# Altium PCB MultiSpikeHoldPCB.PcbDoc
Units mm, origin at the board's own origin, x right, y up, seen from the top; angles counter-clockwise.
Board outline 89.1 x 92.94 mm, 2 copper layers (Top Layer, Bottom Layer), stack 0.071 mm thick; 102 components, 74 nets, 366 pads, 91 vias.
Unrouted connection lines stored in the file: 32.
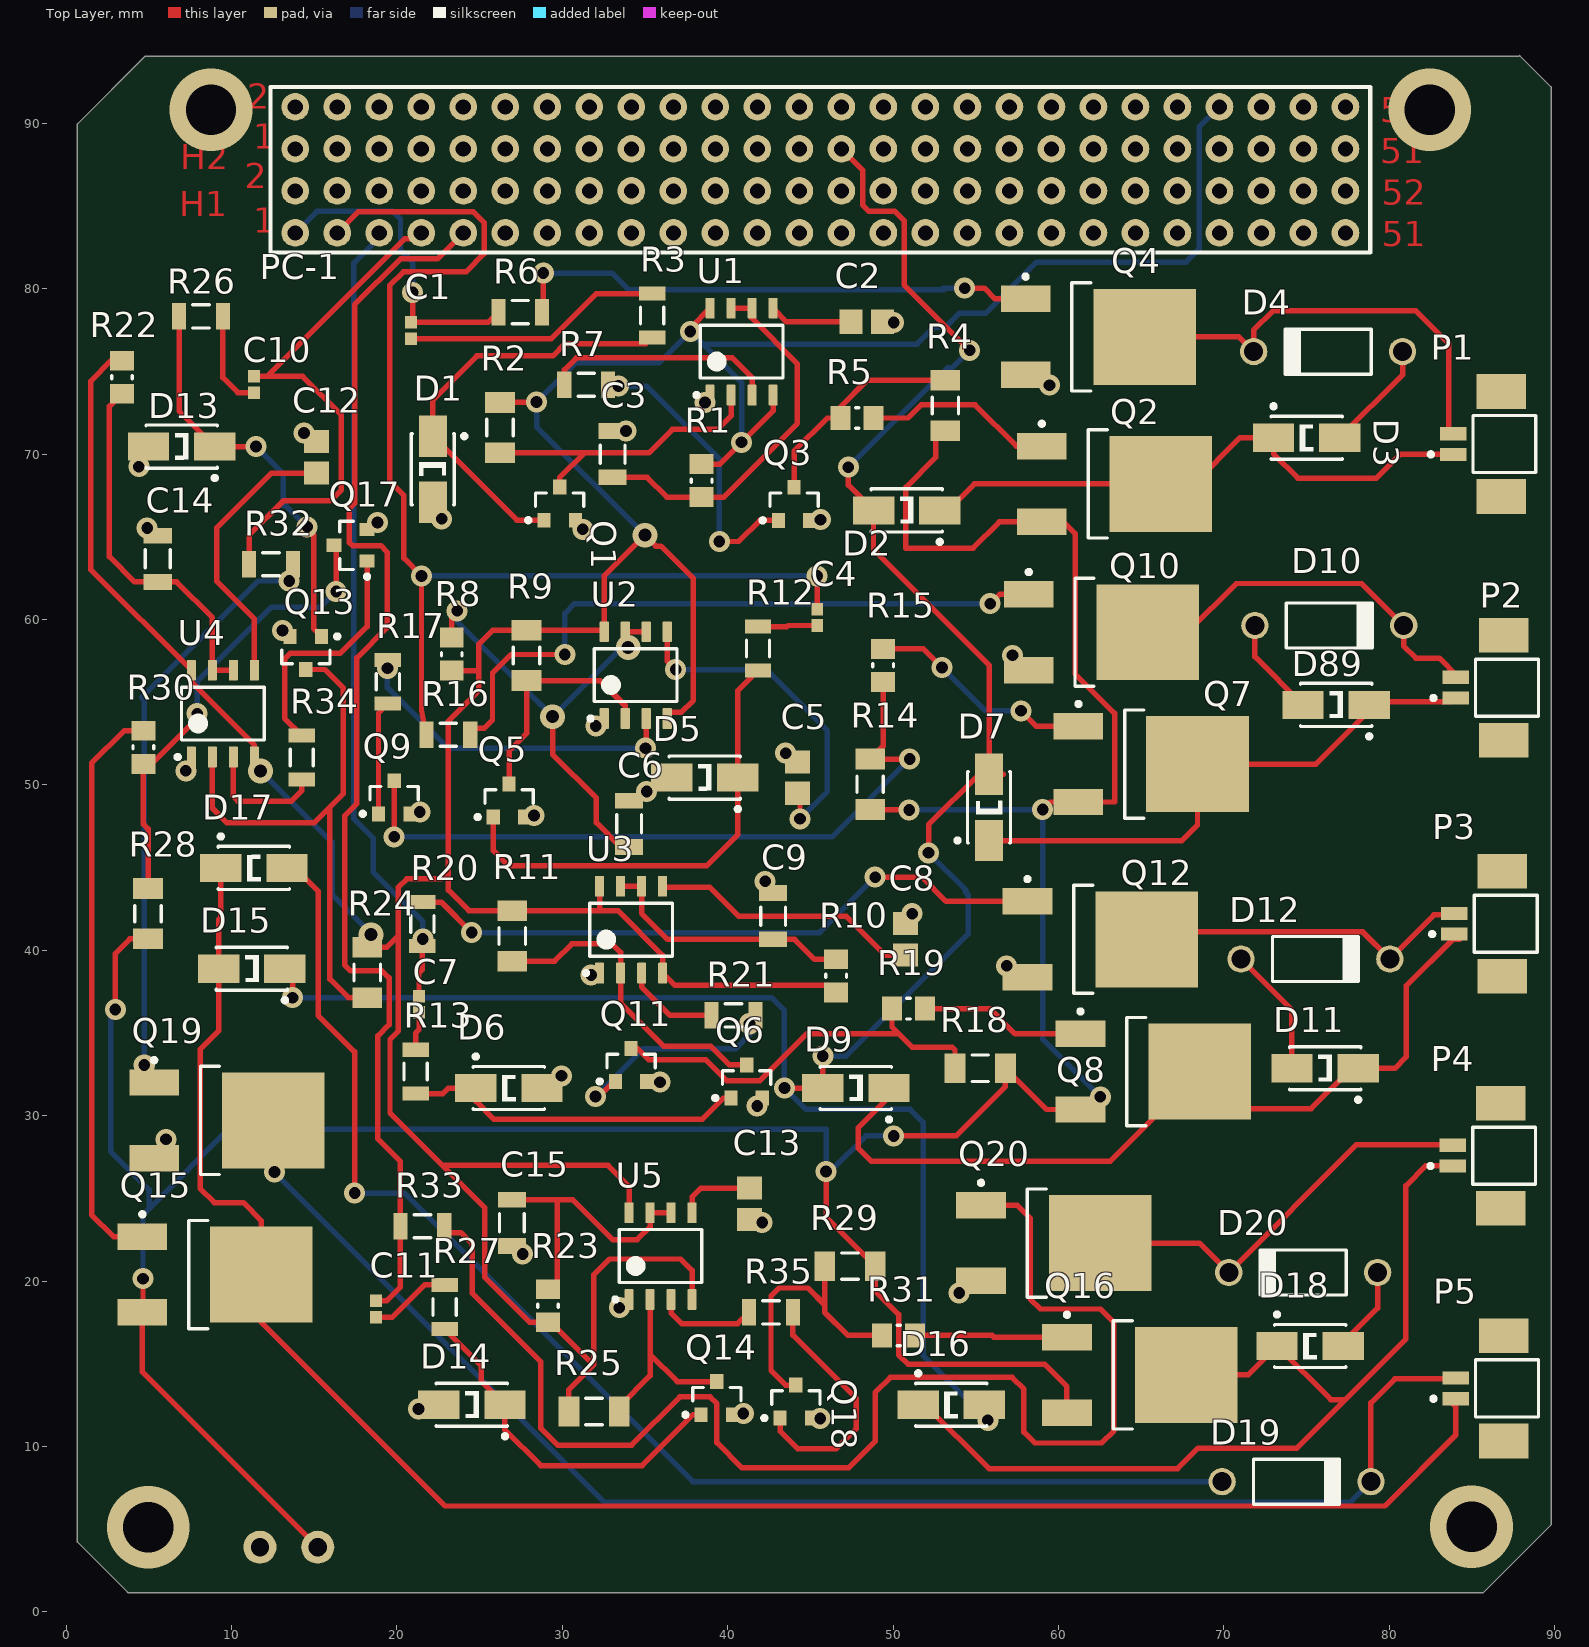
[diagram p0: Top Layer view]
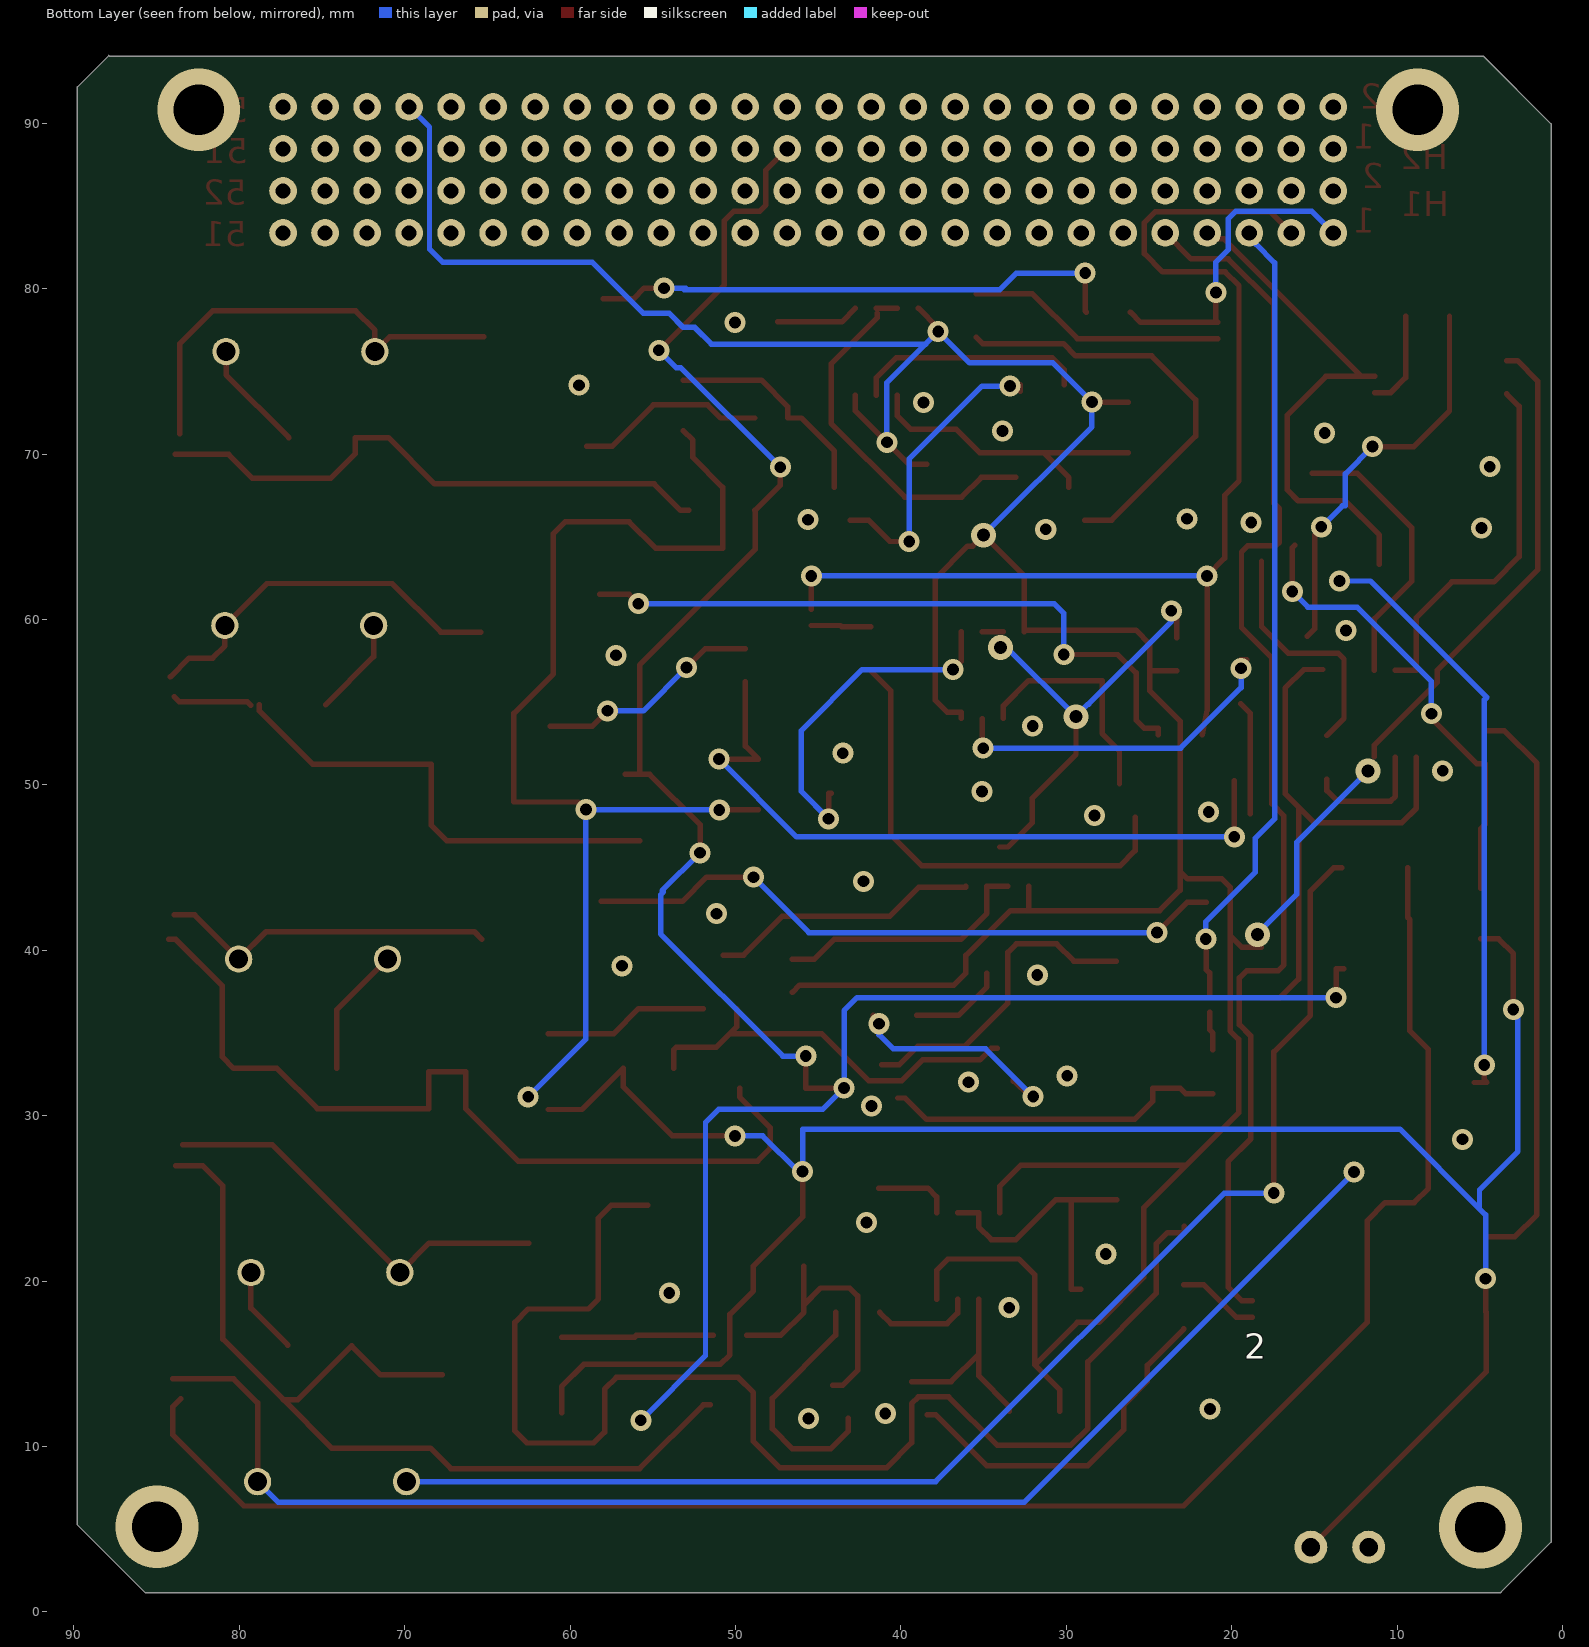
[diagram p1: Bottom Layer view, seen from below]

## Layer stack, top to bottom
Top Solder: solder mask 0.0102, Solder Resist, Dk 3.5
Top Layer: signal copper 0.0356
Bottom Layer: signal copper 0.0356
Bottom Solder: solder mask 0.0102, Solder Resist, Dk 3.5

## Board outline
4.775,94.056 0.686,89.967 0.686,4.216 3.708,1.194 3.734,1.168 84.506,1.168 85.7,1.168 89.789,5.258 89.789,91.821 89.789,92.202 87.884,94.107 87.833,94.056 4.801,94.056

## Design rules (kind name [scope] priority, off if disabled: settings)
Clearance [All] p1: gap=0.254 ignorepadtopadclearanceinfootprint=FALSE except(0: Arc-Hole Track-Hole SMDPad-Hole THPad-Hole Via-Hole Fill-Hole Poly-Hole Region-Hole Text-Hole; 0.127: Track-Track Track-SMDPad Track-THPad SMDPad-SMDPad SMDPad-THPad THPad-THPad)
HoleSize [All] p1: absolutevalues=TRUE maxlimit=3.048 minlimit=0.025 maxpercent=80.000 minpercent=20.000
MinimumSolderMaskSliver [All] p1: minsoldermaskwidth=0.127
PlaneConnect [All] p1: planeconnectstyle=Direct reliefexpansion=0.508 reliefentries=4 reliefconductorwidth=0.254 reliefairgap=0.254
PolygonConnect [All] p1: connectstyle=Direct reliefconductorwidth=0.254 reliefentries=4 polygonreliefangle="90 Angle" airgapwidth=0.254
RoutingVias [All] p1: holewidth=0.711 width=1.27 viastyle="Through Hole" minholewidth=0.711 minwidth=1.27 maxholewidth=0.711 maxwidth=1.27
SolderMaskExpansion [All] p1: expansion=0.102
Width [All] p1: maxlimit=0.559 minlimit=0.305 preferedwidth=0.33
27 further rules are at their usual default settings.

## Components (designator, comment, footprint, x,y, rotation, side; value= is the part's Value field where it differs from the comment)
2 "HighVoltageHeader" Header 9.465,17.072 r0 bottom
C1 "CAP 680pF 50V" CAPC1005X55X25ML05T10 20.853,77.477 r270 top
C2 "0.01uF" CAPC2013X70X45ML10T25 48.412,78.003 r180 top
C3 "1uF" CAPC1206(3216)110_L 33.045,70.002 r270 top
C4 "CAP 680pF 50V" CAPC1005X55X25ML05T10 45.415,60.129 r270 top
C5 "0.01uF" CAPC2013X70X45ML10T25 44.221,50.444 r270 top
C6 "1uF" CAPC1206(3216)110_L 34.036,47.647 r270 top
C7 "CAP 680pF 50V" CAPC1005X55X25ML05T10 21.336,36.736 r270 top
C8 "0.01uF" CAPC2013X70X45ML10T25 50.749,40.665 r270 top
C9 "1uF" CAPC1206(3216)110_L 42.748,42.065 r270 top
C10 "CAP 680pF 50V" CAPC1005X55X25ML05T10 11.354,74.211 r270 top
C11 "CAP 680pF 50V" CAPC1005X55X25ML05T10 18.745,18.313 r270 top
C12 "0.01uF" CAPC2013X70X45ML10T25 15.138,69.809 r270 top
C13 "0.01uF" CAPC2013X70X45ML10T25 41.326,24.674 r90 top
C14 "1uF" CAPC1206(3216)110_L 5.537,63.675 r270 top
C15 "1uF" CAPC1206(3216)110_L 26.949,23.52 r90 top
D1 "S1J-13-F" DIOD-S1M-13-F-SMA-2_V 22.174,69.088 r90 top
D2 "S1J-13-F" DIOD-S1M-13-F-SMA-2_V 50.825,66.599 r0 top
D3 "S1J-13-F" DIOD-S1M-13-F-SMA-2_V 75.006,70.993 r180 top
D4 "1N4757A" FAIR-DO-41-2_V 76.306,76.2 r180 top
D5 "S1J-13-F" DIOD-S1M-13-F-SMA-2_V 38.615,50.444 r0 top
D6 "S1J-13-F" DIOD-S1M-13-F-SMA-2_V 26.772,31.674 r180 top
D7 "S1J-13-F" DIOD-S1M-13-F-SMA-2_V 55.804,48.641 r270 top
D9 "S1J-13-F" DIOD-S1M-13-F-SMA-2_V 47.752,31.674 r0 top
D10 "1N4757A" FAIR-DO-41-2_V 76.378,59.639 r0 top
D11 "S1J-13-F" DIOD-S1M-13-F-SMA-2_V 76.124,32.868 r0 top
D12 "1N4757A" FAIR-DO-41-2_V 75.54,39.472 r0 top
D13 "S1J-13-F" DIOD-S1M-13-F-SMA-2_V 6.985,70.46 r0 top
D14 "S1J-13-F" DIOD-S1M-13-F-SMA-2_V 24.536,12.522 r0 top
D15 "S1J-13-F" DIOD-S1M-13-F-SMA-2_V 11.227,38.887 r0 top
D16 "S1J-13-F" DIOD-S1M-13-F-SMA-2_V 53.518,12.522 r180 top
D17 "S1J-13-F" DIOD-S1M-13-F-SMA-2_V 11.354,44.983 r180 top
D18 "S1J-13-F" DIOD-S1M-13-F-SMA-2_V 75.216,16.078 r180 top
D19 "1N4757A" FAIR-DO-41-2_V 74.397,7.874 r0 top
D20 "1N4757A" FAIR-DO-41-2_V 74.799,20.523 r180 top
D89 "S1J-13-F" DIOD-S1M-13-F-SMA-2_V 76.791,54.839 r0 top
P1 "53261-0271" MOLX-53261-0271_V 85.319,70.612 r90 top
P2 "53261-0271" MOLX-53261-0271_V 85.471,55.88 r90 top
P3 "53261-0271" MOLX-53261-0271_V 85.395,41.605 r90 top
P4 "53261-0271" MOLX-53261-0271_V 85.293,27.584 r90 top
P5 "53261-0271" MOLX-53261-0271_V 85.471,13.513 r90 top
PC-1 "PC-104" PC-104FOOTPRINT 13.855,83.382 r0 top locked
Q1 "MMBTA42LT1G" ONSC-SOT-23-3-318-08_V 29.845,67.005 r90 top
Q2 "MJD127T4G" ONSC-DPAK-3-369C-01_V 63.398,68.199 r0 top
Q3 "MMBTA42LT1G" ONSC-SOT-23-3-318-08_V 44.018,66.996 r90 top
Q4 "MJD122T4G" ONSC-DPAK-3-369C-01_V 62.414,77.093 r0 top
Q5 "MMBTA42LT1G" ONSC-SOT-23-3-318-08_V 26.782,49.057 r90 top
Q6 "MMBTA42LT1G" ONSC-SOT-23-3-318-08_V 41.148,32.071 r90 top
Q7 "MJD127T4G" ONSC-DPAK-3-369C-01_V 65.608,51.257 r0 top
Q8 "MJD127T4G" ONSC-DPAK-3-369C-01_V 65.735,32.664 r0 top
Q9 "MMBTA42LT1G" ONSC-SOT-23-3-318-08_V 19.837,49.251 r90 top
Q10 "MJD122T4G" ONSC-DPAK-3-369C-01_V 62.605,59.233 r0 top
Q11 "MMBTA42LT1G" ONSC-SOT-23-3-318-08_V 34.163,33.071 r90 top
Q12 "MJD122T4G" ONSC-DPAK-3-369C-01_V 62.529,40.665 r0 top
Q13 "MMBTA42LT1G" ONSC-SOT-23-3-318-08_V 14.493,57.979 r270 top
Q14 "MMBTA42LT1G" ONSC-SOT-23-3-318-08_V 39.345,12.919 r90 top
Q15 "MJD127T4G" ONSC-DPAK-3-369C-01_V 9.011,20.396 r0 top
Q16 "MJD127T4G" ONSC-DPAK-3-369C-01_V 64.916,14.326 r0 top
Q17 "MMBTA42LT1G" ONSC-SOT-23-3-318-08_V 17.196,64.491 r180 top
Q18 "MMBTA42LT1G" ONSC-SOT-23-3-318-08_V 44.12,12.716 r90 top
Q19 "MJD122T4G" ONSC-DPAK-3-369C-01_V 9.722,29.718 r0 top
Q20 "MJD122T4G" ONSC-DPAK-3-369C-01_V 59.715,22.301 r0 top
R1 "2 k" RESC2013X60X35ML10T20 38.43,68.402 r270 top
R2 "10 k" RESC3116X65X40ML10T20 26.238,71.603 r90 top
R3 "330" RESC3116X65X40LL10T20 35.433,78.384 r270 top
R4 "10 k" RESC3116X65X40ML10T20 53.162,72.95 r90 top
R5 "4.7 k" YAGO-RC0805_M 47.828,72.187 r0 top
R6 "330" RESC3116X65X40LL10T20 27.457,78.588 r180 top
R7 "330" RESC3116X65X40LL10T20 31.445,74.193 r180 top
R8 "2 k" RESC2013X60X35ML10T20 23.317,57.912 r90 top
R9 "10 k" RESC3116X65X40ML10T20 27.838,57.836 r90 top
R10 "2 k" RESC2013X60X35ML10T20 46.558,38.456 r90 top
R11 "10 k" RESC3116X65X40ML10T20 26.975,40.869 r90 top
R12 "330" RESC3116X65X40LL10T20 41.834,58.242 r270 top
R13 "330" RESC3116X65X40LL10T20 21.133,32.664 r270 top
R14 "10 k" RESC3116X65X40ML10T20 48.616,50.038 r90 top
R15 "4.7 k" YAGO-RC0805_M 49.403,57.226 r90 top
R16 "330" RESC3116X65X40LL10T20 23.11,53.035 r180 top
R17 "330" RESC3116X65X40LL10T20 19.456,56.236 r90 top
R18 "10 k" RESC3116X65X40ML10T20 55.271,32.868 r180 top
R19 "4.7 k" YAGO-RC0805_M 50.936,36.474 r0 top
R20 "330" RESC3116X65X40LL10T20 21.539,41.584 r270 top
R21 "330" RESC3116X65X40LL10T20 40.361,36.068 r180 top
R22 "2 k" RESC2013X60X35ML10T20 3.378,74.651 r270 top
R23 "2 k" RESC2013X60X35ML10T20 29.134,18.507 r90 top
R24 "10 k" RESC3116X65X40ML10T20 18.212,38.658 r90 top
R25 "10 k" RESC3116X65X40ML10T20 31.928,12.116 r180 top
R26 "330" RESC3116X65X40LL10T20 8.153,78.334 r180 top
R27 "330" RESC3116X65X40LL10T20 22.885,18.44 r270 top
R28 "10 k" RESC3116X65X40ML10T20 4.953,42.215 r90 top
R29 "10 k" RESC3116X65X40ML10T20 47.395,20.904 r180 top
R30 "4.7 k" YAGO-RC0805_M 4.674,52.273 r90 top
R31 "4.7 k" YAGO-RC0805_M 50.333,16.713 r0 top
R32 "330" RESC3116X65X40LL10T20 12.395,63.348 r180 top
R33 "330" RESC3116X65X40LL10T20 21.539,23.317 r180 top
R34 "330" RESC3116X65X40LL10T20 14.249,51.664 r270 top
R35 "330" RESC3116X65X40LL10T20 42.617,18.11 r180 top
U1 "NE555DR" D0008A_L 40.843,76.2 r90 top
U2 "NE555DR" D0008A_L 34.442,56.642 r90 top
U3 "NE555DR" D0008A_L 34.163,41.25 r90 top
U4 "NE555DR" D0008A_L 9.474,54.314 r90 top
U5 "NE555DR" D0008A_L 35.941,21.514 r90 top

## Footprints (in the part's own frame and the unit in brackets; to place one, negate y for a bottom-side part, rotate by r counter-clockwise, add the part's x,y. Pads: shape width x height; smd on the part's side, far side on the other; paste and mask are expansions set on the pad)
CAPC1005X55X25ML05T10 [mm] "Chip Capacitor, 2-Leads, Body 1.05x0.55mm, IPC Low Density"
  rect 0.76x0.72 smd: 1(-0.49,0) 2(0.49,0)
  body extent -0.53,-0.28 0.53,0.28, height 0.55
CAPC1206(3216)110_L [mm] "Chip Capacitor, Body 3.2x1.6mm, Height 1.1mm, IPC High Density"
  rect 0.95x1.7 smd: 1(-1.4,0) 2(1.4,0)
  silkscreen extent -0.55,-0.75 0.55,0.75, body extent -1.7,-0.9 1.7,0.9, height 1.1
CAPC2013X70X45ML10T25 [mm] "Chip Capacitor, 2-Leads, Body 2.00x1.25mm, IPC Low Density"
  rect 1.4x1.5 smd: 1(-0.95,0) 2(0.95,0)
  body extent -1.05,-0.67 1.05,0.67, height 0.7
D0008A_L [mm] "SOIC, 8-Leads, Body 5x4mm, Pitch 1.27mm, IPC High Density"
  rrect18% 1.25x0.55 smd: 1(-2.625,1.905) 2(-2.625,0.635) 3(-2.625,-0.635) 4(-2.625,-1.905) 5(2.625,-1.905) 6(2.625,-0.635) 7(2.625,0.635) 8(2.625,1.905)
  silkscreen extent -2.75,-2.5 1.6,2.85, body extent -3,-2.45 3,2.45, height 1.63
DIOD-S1M-13-F-SMA-2_V [mm] "SMD, 2-Leads, Body 4.3x2.605mm, Height 2.3mm"
  rect 2.5x1.7 smd: 1(-2,0) 2(2,0)
  silkscreen extent -2.15,-2.03 2.15,1.3, body extent -2.15,-1.3 2.15,1.3, height 2.3
FAIR-DO-41-2_V [mm] "2-Leads, Axial leaded, Body 2.72x5.2mm, Pin Spacing 9mm"
  round 1.65 hole 1.15: 1(-4.5,0) 2(4.5,0)
  silkscreen extent -2.6,-1.36 2.6,1.36, body extent -4.93,-1.36 4.93,1.36, height 2.71
Header [mm] "High Voltage Connector"
  round 2 hole 1.1: 1(5.75,13.16) 2(2.25,13.16)
  body extent 1.02,0.89 6.86,14.6, height 0.25
MOLX-53261-0271_V [mm] "Header, 2-Leads, Pitch 1.25mm"
  rect 0.8x1.6 smd: 1(-0.625,1.45) 2(0.625,1.45)
  rect 2.1x3 smd: MP1(-3.175,-1.45) MP2(3.175,-1.45)
  silkscreen extent -1.73,-3.55 1.73,2.92, body extent -3.82,-3.55 3.83,1.65, height 3.41
ONSC-DPAK-3-369C-01_V [mm] "DPAK, 3-Leads, Body 6.54x6.095mm, Pitch 2.29mm"
  rect 3x1.6 smd: 1(-4.4,2.29) 3(-4.4,-2.29)
  rect 6.2x5.8 smd: 4(2.8,0)
  silkscreen extent -4.52,-3.27 -0.45,3.76, body extent -1.6,-3.27 4.49,3.27, height 2.38
ONSC-SOT-23-3-318-08_V [mm] "SOT23, 3-Leads, Body 2.92x1.3mm, Pitch 0.95mm"
  rect 0.9x0.8 smd: 1(-1,0.95) 2(-1,-0.95) 3(1,0)
  silkscreen extent -1.12,-1.46 0.65,2.02, body extent -0.65,-1.46 0.65,1.46, height 1.11
PC-104FOOTPRINT [mm]
  round 1.676 hole 0.914 mask+0.076: H1_1(0,0) H1_2(0,2.54) H1_3(2.54,0) H1_4(2.54,2.54) H1_5(5.08,0) H1_6(5.08,2.54) H1_7(7.62,0) H1_8(7.62,2.54) H1_9(10.16,0) H1_10(10.16,2.54) H1_11(12.7,0) H1_12(12.7,2.54) H1_13(15.24,0) H1_14(15.24,2.54) H1_15(17.78,0) H1_16(17.78,2.54) H1_17(20.32,0) H1_18(20.32,2.54) H1_19(22.86,0) H1_20(22.86,2.54) H1_21(25.4,0) H1_22(25.4,2.54) H1_23(27.94,0) H1_24(27.94,2.54) H1_25(30.48,0) H1_26(30.48,2.54) H1_27(33.02,0) H1_28(33.02,2.54) H1_29(35.56,0) H1_30(35.56,2.54) H1_31(38.1,0) H1_32(38.1,2.54) H1_33(40.64,0) H1_34(40.64,2.54) H1_35(43.18,0) H1_36(43.18,2.54) H1_37(45.72,0) H1_38(45.72,2.54) H1_39(48.26,0) H1_40(48.26,2.54) H1_41(50.8,0) H1_42(50.8,2.54) H1_43(53.34,0) H1_44(53.34,2.54) H1_45(55.88,0) H1_46(55.88,2.54) H1_47(58.42,0) H1_48(58.42,2.54) H1_49(60.96,0) H1_50(60.96,2.54) H1_51(63.5,0) H1_52(63.5,2.54) H2_1(0,5.08) H2_2(0,7.62) H2_3(2.54,5.08) H2_4(2.54,7.62) H2_5(5.08,5.08) H2_6(5.08,7.62) H2_7(7.62,5.08) H2_8(7.62,7.62) H2_9(10.16,5.08) H2_10(10.16,7.62) H2_11(12.7,5.08) H2_12(12.7,7.62) H2_13(15.24,5.08) H2_14(15.24,7.62) H2_15(17.78,5.08) H2_16(17.78,7.62) H2_17(20.32,5.08) H2_18(20.32,7.62) H2_19(22.86,5.08) H2_20(22.86,7.62) H2_21(25.4,5.08) H2_22(25.4,7.62) H2_23(27.94,5.08) H2_24(27.94,7.62) H2_25(30.48,5.08) H2_26(30.48,7.62) H2_27(33.02,5.08) H2_28(33.02,7.62) H2_29(35.56,5.08) H2_30(35.56,7.62) H2_31(38.1,5.08) H2_32(38.1,7.62) H2_33(40.64,5.08) H2_34(40.64,7.62) H2_35(43.18,5.08) H2_36(43.18,7.62) H2_37(45.72,5.08) H2_38(45.72,7.62) H2_39(48.26,5.08) H2_40(48.26,7.62) H2_41(50.8,5.08) H2_42(50.8,7.62) H2_43(53.34,5.08) H2_44(53.34,7.62) H2_45(55.88,5.08) H2_46(55.88,7.62) H2_47(58.42,5.08) H2_48(58.42,7.62) H2_49(60.96,5.08) H2_50(60.96,7.62) H2_51(63.5,5.08) H2_52(63.5,7.62)
  silkscreen extent -1.5,-1.19 65,8.81
RESC2013X60X35ML10T20 [mm] "Chip Resistor, 2-Leads, Body 2.00x1.25mm, IPC Low Density"
  rect 1.2x1.45 smd: 1(-1,0) 2(1,0)
  silkscreen extent -0.1,-0.62 0.1,0.62, body extent -1.05,-0.67 1.05,0.67, height 0.6
RESC3116X65X40LL10T20 [mm] "Chip Resistor, 2-Leads, Body 3.10x1.60mm, IPC High Density"
  rect 0.85x1.6 smd: 1(-1.325,0) 2(1.325,0)
  silkscreen extent -0.5,-0.7 0.5,0.7, body extent -1.6,-0.85 1.6,0.85, height 0.65
RESC3116X65X40ML10T20 [mm] "Chip Resistor, 2-Leads, Body 3.10x1.60mm, IPC Low Density"
  rect 1.25x1.8 smd: 1(-1.525,0) 2(1.525,0)
  silkscreen extent -0.5,-0.8 0.5,0.8, body extent -1.6,-0.85 1.6,0.85, height 0.65
YAGO-RC0805_M [mm] "Chip Resistor, 2-Leads, Body 2.00x1.25mm, IPC Low Density"
  rect 1.2x1.45 smd: 1(-1,0) 2(1,0)
  silkscreen extent -0.1,-0.62 0.1,0.62, body extent -1,-0.62 1,0.63, height 0.6

## Part data
C1 C4 C7 C10 C11: library part CMP-2008-04665-4, "Chip Capacitor, 680 pF, +/- 10%, 50 V, -55 to 125 degC, 0402 (1005 Metric), RoHS, Tape and Reel", Capacitance="680 pF", Case\/Package=0402, Case Code (Metric)=1005, Manufacturer="Basic Passives", Max Operating Temperature="125 degC", Min Operating Temperature="-55 degC", Package Quantity=10000, PartNumber=GRM155R71H681KA01D, Tolerance=10%, Type (Capacitors)=X7R, Voltage rating="50 V", Case Code (Imperial)=0402, ComponentLink1Description="Manufacturer URL", ComponentLink1URL=http://www.murata.com/, ComponentLink2Description=Datasheet, ComponentLink2URL=http://search.murata.co.jp/Ceramy/image/img/A01X/G101/ENG/GRM155R71H681KA01-01.pdf, DatasheetVersion=02/2016, Height="0.5 mm", Lead Pitch="2 mm", Length="1 mm", Mount="Surface Mount", Mounting Technology="Surface Mount", PackageDescription="2-Pin Surface Mount Device, Body 1 x 0.5 mm", PackageReference=0402, Packaging="Tape and Reel", Pins=2, Radiation Hardening=No, RoHSCompliant=true, Voltage Rating (DC)="50 V", Width="0.5 mm"
C2 C5 C8 C12 C13: library part CMP-2000-05013-1, "Chip Capacitor, 10 nF, +/- 10%, 50 V, -55 to 125 degC, 0805 (2012 Metric), RoHS, Tape and Reel", Capacitance - nF=10nF, Capacitance - pF=10000pF, Case Code - in=0805, Case Code - mm=2012, Case Height=0.6mm, Case Length=2mm, Case Width=1.25mm, Dielectric=X7R, Manufacturer=Murata, Maximum Operating Temperature=+125C, Minimum Operating Temperature=-55C, Operating Temperature Range=-55Cto+125C, Package / Case=0805(2012metric), Temperature Coefficient / Code=+/-15%, Tolerance=10%, Voltage rating=50V, Brand=MurataElectronics, Capacitance=0.01uF, Datasheet URL=https://datasheet.ciiva.com/29201/452521-da-01-en-vs-kondensator-0805-29201121.pdf, Datasheet Version=Dec-10, Dimensions=1.25mmWx2mmLx0.6mmH, Factory Pack Quantity=4000, Manufacturer URL=http://www.murata.com/, Packaging=Reel, Product=GeneralTypeMLCCs, Product Category=MultilayerCeramicCapacitorsMLCC-SMD/SMT, RoHS=Details, Series=GRM, Termination Style=SMD/SMT, Type=GeneralPurposeMLCC, Voltage Rating DC=50V
C3 C6 C9 C14 C15: library part CMP-1037-04718-1, "CAP 1uF 50V ±10% 1206 (3216 Metric) Thickness 1.1mm SMD", Case-EIA=1206, Case-Metric=3216, Rated Voltage="50 V", Tolerance=±10%, Max Thickness="1.1 mm", Technology=SMT
D1 D2 D3 D5 D6 D7 D9 D11 D13 D14 D15 D16 D17 D18 D89: library part CMP-0639-00001-1, "Surface Mount Glass Passivated Rectifier, 1000V, 1 A, -65 to 125 degC, 2-Pin SMA Package, RoHS, Tape and Reel", Forward Voltage Drop VF (V)=1.1, Manufacturer="Diodes Inc", Maximum Average Rectified Current IO (A)=1, Maximum Peak Forward Surge Current IFSM (A)=30, Maximum Reverse Current IR (uA)=5, Operating Temperature Range="-65 to 150 degC", PartNumber=S1M-13-F, Peak Repetitive Reverse Voltage VRRM (V)=1000, Total Capacitance CT (pF)=10, ComponentLink1Description="Manufacturer URL", ComponentLink1URL=http://www.diodes.com/, ComponentLink2Description=Datasheet, ComponentLink2URL=http://diodes.com/datasheets/ds16003.pdf, ComponentLink3Description="Package Specification", ComponentLink3URL=http://diodes.com/datasheets/ds16003.pdf, DatasheetVersion="Rev. 22 - 2", Mounting Technology="Surface Mount", PackageDescription="2-Pin SMD, Body 4.3 x 2.605 mm, Height 2.3 mm", PackageReference=S1M-13-F-SMA-2, PackageVersion="Rev. 22 - 2", Packing="Tape and Reel", RoHS=TRUE
D4 D10 D12 D19 D20: library part CMP-0892-00018-1, "Zener Diode, 51V, 1W, 5%, -65 to 200 degC, 2-Pin DO-41, Body 2.72 x 5.2 mm, RoHS", Manufacturer="Fairchild Semiconductor", Operating and Storage Temperature Range="-65 to 200 degC", Test Current IZ (mA)=5, Tolerance=5%, ComponentLink1Description="Manufacturer URL", ComponentLink1URL=http://www.fairchildsemi.com/, ComponentLink2Description=Datasheet, ComponentLink2URL=http://www.fairchildsemi.com/ds/1N/1N4744A.pdf, ComponentLink3Description="Package Specification", ComponentLink3URL=http://www.fairchildsemi.com/dwg/DO/DO41A.pdf, DatasheetVersion="Rev. H3", IR (uA)=5, Mounting Technology="Through Hole", PackageDescription="2-Pin Axial leaded, Body 2.72 x 5.2 mm, Lead Spread 25.4 mm", PackageReference=DO-41-2, PackageVersion="Rev. 2", PartNumber=1N4757A, PD (W)=1, RoHS=TRUE, VZ (Max.) (V)=53.55, VZ (Min.) (V)=48.45, ZZ (Max) (ohm)=95
P1 P2 P3 P4 P5: library part CMP-2000-05633-1, "PicoBlade(TM) Header, Right Angle, -40 to 85 degC, 2-Pin SMD, RoHS, Tape and Reel", Current - Max=1A, Manufacturer=Molex, Package Description="2-Leads Header, Pitch 1.25 mm, Mated Height 3.4 mm", Package Version="Rev. H, 11/2014", Voltage - Max=125V, =0532610271, Brand=Molex, Contact material=PhosphorBronze, Contact Plating=Tin, Current rating=1A, Datasheet URL=http://www.molex.com/webdocs/datasheets/pdf/en-us/0532610271_PCB_HEADERS.pdf, Datasheet Version=03/2016, Factory Pack Quantity=1000, Housing material=Thermoplastic, Manufacturer URL=http://www.molex.com/, Mounting Angle=Right, Mounting Style=SMD/SMT, Mounting Technology=SurfaceMount, Number of Positions=2, Number of Positions / Contacts=2, Number of Rows=1, Package Reference=53261-0271, Package URL=http://www.molex.com/pdm_docs/sd/532610271_sd.pdf, Packaging=Reel, Pitch=1.25mm, Product Category=1.25mmConnectors, Product Type=Headers, RoHS=Details, Series=53261, Termination Style=SMD, Tradename=PicoBlade, Type=Shrouded, Voltage rating=125V
Q1 Q3 Q5 Q6 Q9 Q11 Q13 Q14 Q17 Q18: library part CMP-1048-00662-1, "High Voltage Transistor, NPN Silicon, 3-Pin SOT-23, Pb-Free, Tape and Reel", Manufacturer="On Semiconductor", ComponentLink1Description="Manufacturer URL", ComponentLink1URL=http://www.onsemi.com/, ComponentLink2Description=Datasheet, ComponentLink2URL=http://www.onsemi.cn/pub_link/Collateral/MMBTA42LT1-D.PDF, ComponentLink3Description="Package Specification", ComponentLink3URL=http://www.onsemi.cn/pub_link/Collateral/318-08.PDF, DatasheetVersion="Rev. 12", fT Min (MHz)=50, IC Continuous (A)=0.5, Mounting Technology="Surface Mount", PackageDescription="3-Pin Small Outline Transistor, Body 2.92 x 1.3 mm, Pitch 0.95 mm", PackageReference=SOT-23-3-318-08, PackageVersion="Rev. AP, 11/2009", Packing="Tape and Reel", PartNumber=MMBTA42LT1G, Polarity=NPN, RoHS=TRUE
Q2 Q7 Q8 Q15 Q16: library part CMP-1047-00009-1, "Complementary Darlington Power Transistor, 3-Pin DPAK, Pb-Free, Tape and Reel", Manufacturer="On Semiconductor", ComponentLink1Description="Manufacturer URL", ComponentLink1URL=http://www.onsemi.com/, ComponentLink2Description=Datasheet, ComponentLink2URL=http://www.onsemi.com/pub_link/Collateral/MJD122-D.PDF, ComponentLink3Description="Package Specification", ComponentLink3URL=http://www.onsemi.cn/pub_link/Collateral/369C.PDF, DatasheetVersion="Rev. 13", hFE Max (k)=12, IC Continuous (A)=8, Mounting Technology="Surface Mount", PackageDescription="3-Pin Flange Mount, Body 6.54 x 6.095 mm, Pitch 2.29 mm", PackageReference=DPAK-3-369C-01, PackageVersion="Rev. E, 02/2014", Packing="Tape and Reel", PartNumber=MJD127T4G, Polarity=PNP, RoHS=TRUE
Q4 Q10 Q12 Q19 Q20: library part CMP-1047-00007-1, "Complementary Darlington Power Transistor, 3-Pin DPAK, Pb-Free, Tape and Reel", Manufacturer="On Semiconductor", ComponentLink1Description="Manufacturer URL", ComponentLink1URL=http://www.onsemi.com/, ComponentLink2Description=Datasheet, ComponentLink2URL=http://www.onsemi.com/pub_link/Collateral/MJD122-D.PDF, ComponentLink3Description="Package Specification", ComponentLink3URL=http://www.onsemi.cn/pub_link/Collateral/369C.PDF, DatasheetVersion="Rev. 13", hFE Max (k)=12, IC Continuous (A)=8, Mounting Technology="Surface Mount", PackageDescription="3-Pin Flange Mount, Body 6.54 x 6.095 mm, Pitch 2.29 mm", PackageReference=DPAK-3-369C-01, PackageVersion="Rev. E, 02/2014", Packing="Tape and Reel", PartNumber=MJD122T4G, Polarity=NPN, RoHS=TRUE
R1 R8 R10 R22 R23: library part CMP-2001-01361-1, Manufacturer=Yageo, Part Number=RC0805JR-072KL
R2 R4 R9 R11 R14 R18 R24 R25 R28 R29: library part CMP-2100-03676-1, "Chip Resistor, 10 KOhm, +/- 1%, 0.25 W, -55 to 155 degC, 1206 (3216 Metric), RoHS, Tape and Reel", Case/Package=1206, Case Code (Metric)=3216, Manufacturer=Yageo, Max Operating Temperature=155degC, Min Operating Temperature=-55degC, Package Description="2-Pin Surface Mount Device, Body 3.1 x 1.6 mm", Package Quantity=5000, Package Reference=1206.0, Power Rating=250mW, Resistance=10KOhm, Temperature Coefficient=100ppm/degreesC, Tolerance=1%, Voltage rating=200V, Case Code (Imperial)=1206, Composition=ThickFilm, Datasheet URL=http://www.yageo.com/NewPortal/yageodocoutput?fileName=/pdf/R-Chip/PYu-RC_Group_51_RoHS_L_5.pdf, Datasheet Version="Rev. 5, 10/2016", Depth=1.6mm, Height=0.55mm, Lead Free=LeadFree, Length=3.1mm, Manufacturer URL=http://www.yageo.com/, Military Standard=Not, Packaging=TapeandReel, REACH SVHC=Unknown, RoHSCompliant=true, Termination=SMD/SMT, Width=1.6mm
R3 R6 R7 R12 R13 R16 R17 R20 R21 R26 R27 R32 R33 R34 R35: library part CMP-2000-06969-1, "Chip Resistor, 330 Ohm, +/- 1%, 250 mW, -55 to 155 degC, 1206 (3216 Metric), RoHS, Tape and Reel", Case Code - in=1206, Case Code - mm=3216, Manufacturer=Yageo, Operating Temperature Range=-55Cto+155C, Package Description="2-Pin Surface Mount Device, Body 3.1 x 1.6 mm", Power Rating=250mW(1/4W), Resistance=330Ohms, Temperature Coefficient=100PPM/C, Tolerance=1%, Voltage rating=200V, Datasheet URL=http://www.yageo.com/documents/recent/PYu-RC_Group_51_RoHS_L_7.pdf, Datasheet Version="Rev. 7, 05/2017", Manufacturer URL=http://www.yageo.com/, Mounting Technology=SurfaceMount, Package Reference=1206, Packaging=Reel, Product=ThickFilmResistorsGeneralPurpose, Series=RC, Termination Style=SMD/SMT
R5 R15 R19 R30 R31: library part CMP-1568-00001-1, "General Puprose Chip Resistor, 4700 Ohm +/- 1%, 0.125 W, -55 to 155 degC, 2-Pin SMD, RoHS, Tape and Reel", PartNumber=RC0805FR-074K7L, Power="0.125 W", Resistance="4700 Ohm", Temperature Max="155 degC", Temperature Min="-55 degC", Tolerance="+/- 1%", ComponentLink1Description="Manufacturer URL", ComponentLink1URL=http://www.yageo.com/NewPortal/_en/index.jsp, ComponentLink2Description=Datasheet, ComponentLink2URL=http://www.yageo.com/documents/recent/PYu-RC_Group_51_RoHS_L-3.pdf, DatasheetVersion="Rev. 3", Mounting Technology="Surface Mount", PackageDescription="2-Pin Surface Mount Device, Body 2 x 1.25 mm", Packing="Tape and Reel", RoHS=TRUE
U1 U2 U3 U4 U5: library part CMP-1685-00007-1, "Precision Timer, 4.5 to 16 V, 0 to 70 degC, 8-Pin SOIC (D8), Green (RoHS & no Sb/Br), Tape and Reel", Case\Package=SMA, Forward Current="1 A", Forward Voltage="450 mV", Max Operating Temperature="125 degC", Max Surge Current="30 A", Min Operating Temperature="-55 degC", Package Quantity=1, Peak Reverse Current="500 uA", Code_JEDEC=MS-012, ComponentLink1Description="Manufacturer URL", ComponentLink1URL=http://www.ti.com/, ComponentLink2Description=Datasheet, ComponentLink2URL=http://www.ti.com/general/docs/lit/getliterature.tsp?genericPartNumber=NE555&fileType=pdf, ComponentLink3Description="Package Specification", ComponentLink3URL=http://www.ti.com/lit/ml/msoi002j/msoi002j.pdf, DatasheetVersion="SLFS022I, 09/2014", Height="2.44 mm", Length="4.57 mm", Mount="Surface Mount", PackageDescription="8-Pin Small Outline Integrated Circuit, Body 4.9 x 3.9 mm, Pitch 1.27 mm", PackageReference=D0008A, PackageVersion="4040047-3/M, 06/2011", Packaging="Cut Tape", Pins=2, Radiation Hardening=No, REACH SVHC=Unknown, RoHSCompliant=true, Width="2.84 mm"

## Via types
v1: diameter 1.27, hole 0.711, Top Layer to Bottom Layer, 82 vias
v2: diameter 1.5, hole 0.78, Top Layer to Bottom Layer, 5 vias
v3: diameter 5, hole 3.048, Top Layer to Bottom Layer, 4 vias

## Nets (pads, with @x,y where several pads share a name; then routed paths per layer and width w, separated by ;. In a path a pad name is that pad's centre, name@x,y a point inside that pad or via, vN(x,y) a via of type N, cw(c..) or ccw(c..) an arc to the next point about the centre after c; other vN are vias at no path point)
"+ Valve 1": D2.2 D3.2 P1.1 Q2.4 | length 35
  Top Layer w0.33: D2.2 53.315,66.599 54.915,68.199 Q2.4 68.199,68.199 70.993,70.993 D3.2 73.006,70.021 74.473,68.555 79.223,68.555 80.655,69.987 P1.1
"+ Valve 2": D7.2 D89.2 P2.1 Q7.4 | length 33.6
  Top Layer w0.33: D7.2 55.804,46.634 67.468,46.634 68.408,47.574 Q7.4 75.565,51.257 78.791,54.483 D89.2 ; D89.2@79.299,54.813 79.527,55.042 83.642,55.042 P2.1@83.947,55.347
"+ Valve 3": D9.2 D11.2 P3.1 Q8.4 | length 53.6
  Top Layer w0.33: D9.2 49.752,31.134 47.904,29.286 47.904,28.016 48.667,27.254 63.144,27.254 66.319,30.429 66.319,32.664 Q8.4 68.535,30.429 75.285,30.429 77.724,32.868 D11.2 80.34,32.868 81.026,33.553 81.026,37.846 83.849,40.669 P3.1@84.256,40.669
"+ Valve 4": D15.1 D17.2 P5.1 Q15.4 | length 111.5
  Top Layer w0.33: D17.2 9.354,41.986 9.227,41.859 D15.1 9.227,35.135 8.103,34.011 8.103,25.611 8.97,24.743 10.715,24.743 11.811,23.647 Q15.4 11.811,17.501 22.911,6.401 79.731,6.401 84.023,10.693 84.023,12.403 P5.1@83.538,12.888
"+ Valve 5": D16.2 D18.2 P4.1 Q16.4 | length 58.6
  Top Layer w0.33: D16.2 51.943,12.522 55.804,8.661 67.208,8.661 68.453,9.906 74.422,9.906 77.343,12.827 ; Q16.4 71.463,14.326 D18.2 76.467,12.827 77.343,12.827 ; P4.1@83.843,26.975 82.22,26.975 81,25.755 81,16.484 77.343,12.827
"- Valve 1": D4.2 P1.2 Q4.4 | length 26.8
  Top Layer w0.33: Q4.4 70.913,77.093 D4.2 71.806,77.495 72.974,78.664 81.61,78.664 83.591,76.683 P1.2@83.591,71.237
"- Valve 2": D10.2 P2.2 Q10.4 | length 23.1
  Top Layer w0.33: Q10.4 67.818,59.233 70.764,62.179 78.338,62.179 D10.2 80.878,58.406 81.61,57.673 83.03,57.673 P2.2@84.173,56.53
"- Valve 3": D12.2 P3.2 Q12.4 | length 20.6
  Top Layer w0.33: Q12.4 65.786,41.123 78.389,41.123 D12.2 82.707,42.139 P3.2@83.945,42.139
"- Valve 4": D19.2 P5.2 Q19.4 | length 85.6
  Top Layer w0.33: D19.2 78.897,12.644 80.34,14.087 P5.2@84.021,14.087
  Bottom Layer w0.33: v1(12.598,26.594) 12.598,26.568 32.537,6.629 77.652,6.629 D19.2
"- Valve 5": D20.2 P4.2 Q20.4 | length 24.8
  Top Layer w0.33: Q20.4 68.521,22.301 D20.2 78.02,28.245 P4.2@83.414,28.245
GND: C2.1 C3.1 C5.1 C6.1 C8.1 C9.1 C12.1 C13.1 C14.1 C15.1 D1.1 D5.1 D6.1 D13.1 D14.1 PC-1.H2_29 Q1.2 Q3.2 Q4.3 Q5.2 Q6.2 Q9.2 Q10.3 Q11.2 Q12.3 Q13.2 Q14.2 Q17.2 Q18.2 Q19.3 Q20.3 U1.1 U2.1 U3.1 U4.1 U5.1
  other v1: 45.593,11.684 40.945,11.989 21.311,12.268 33.452,18.39 54,19.279 27.61,21.641 42.088,23.546 6.045,28.575 41.783,30.582 35.916,32.029 29.947,32.41 31.75,38.506 56.871,39.065 51.156,42.215 42.266,44.171 28.296,48.158 21.387,48.362 35.103,49.606 7.239,50.851 43.51,51.918 32.029,53.569 57.226,57.836 13.081,59.334 31.242,65.456 4.902,65.532 18.821,65.862 45.618,66.04 22.708,66.091 4.394,69.24 14.376,71.272 33.858,71.399 38.633,73.127 59.461,74.168 50.038,77.953
NetC1_2: C1.2 R3.1 | length 15.7
  Top Layer w0.33: C1.2 29.337,76.987 32.059,79.709 R3.1
NetC2_2: C2.2 U1.5 | length 5.1
  Top Layer w0.33: U1.5 43.57,78.003 C2.2
NetC3_2: C3.2 R1.2 U1.6 U1.7 | length 22.6
  Top Layer w0.33: C3.2 35.128,68.602 36.328,67.402 R1.2 39.767,67.402 44.221,71.857 44.221,75.463 41.427,78.257 U1.6@41.427,78.511 ; U1.7 U1.6
NetC4_2: C4.2 R12.1 | length 3.6
  Top Layer w0.33: R12.1 43.586,59.567 43.658,59.639 C4.2
NetC5_2: C5.2 U2.5 | length 20.9
  Top Layer w0.33: U2.5 36.347,57.48 v1(36.855,56.972) ; C5.2 44.374,49.494 v1(44.374,47.955)
  Bottom Layer w0.33: v1(36.855,56.972) 42.342,56.972 46.025,53.289 46.025,49.606 v1(44.374,47.955)
NetC6_2: C6.2 R8.2 U2.6 U2.7 | length 28.2
  Top Layer w0.33: R8.2 23.317,60.198 v1(23.647,60.528) ; v2(29.413,54.127) 29.413,51.841 32.055,49.2 32.055,47.727 33.534,46.247 C6.2 ; U2.7 U2.6
  Bottom Layer w0.33: v1(23.647,60.528) 23.647,59.893 28.651,54.889 28.677,54.889 v2@29.426,54.14 ; v2(29.413,54.127) v2@29.426,54.14 ; v2(33.985,58.318) 33.604,58.318 v2@29.426,54.14
NetC7_2: C7.2 R13.1 | length 2.3
  Top Layer w0.33: R13.1 21.133,35.001 21.336,35.204 C7.2
NetC8_2: C8.2 U3.5 | length 16.4
  Top Layer w0.33: U3.5 36.068,43.815 38.913,43.815 40.665,42.062 47.168,42.062 49.515,39.715 C8.2
NetC9_2: C9.2 R10.2 U3.6 U3.7 | length 15.8
  Top Layer w0.33: U3.7 U3.6 34.798,42.24 36.373,40.665 C9.2 44.043,40.665 45.253,39.456 R10.2
NetC10_2: C10.2 R26.1 | length 6
  Top Layer w0.33: R26.1 9.478,74.625 10.382,73.721 C10.2
NetC11_2: C11.2 R27.1 | length 4.9
  Top Layer w0.33: C11.2 19.731,17.823 21.673,19.765 R27.1
NetC12_2: C12.2 U4.5 | length 16.9
  Top Layer w0.33: U4.5 11.379,60.045 9.119,62.306 9.119,65.557 12.421,68.859 C12.2
NetC13_2: C13.2 U5.5 | length 4.7
  Top Layer w0.33: U5.5 37.846,25.095 38.375,25.624 C13.2
NetC14_2: C14.2 R22.2 U4.6 U4.7 | length 22.4
  Top Layer w0.33: R22.2 2.616,72.889 2.616,63.799 4.14,62.275 C14.2 6.68,62.275 8.839,60.116 U4.7 U4.6
NetC15_2: C15.2 R23.2 U5.6 U5.7 | length 17.8
  Top Layer w0.33: C15.2 29.693,24.92 ; R23.2 29.693,19.507 29.693,24.92 ; U5.6 U5.7 35.306,23.279 34.531,22.504 33.045,22.504 30.629,24.92 29.693,24.92
NetD1_2: D1.2 Q1.1 R3.2 | length 25.8
  Top Layer w0.33: Q1.1 27.257,66.005 D1.2 22.174,73.279 24.841,75.946 29.439,75.946 30.175,76.683 35.056,76.683 R3.2
NetD3_1: D3.1 D4.1 | length 6.8
  Top Layer w0.33: D3.1 80.806,74.793 D4.1
NetD5_2: D5.2 Q5.1 R12.2 | length 28.4
  Top Layer w0.33: Q5.1 25.832,46.025 26.746,45.11 38.735,45.11 40.615,46.99 D5.2 40.615,55.698 R12.2
NetD6_2: D6.2 Q6.1 R13.2 | length 21
  Top Layer w0.33: R13.2 22.784,31.339 23.118,31.674 D6.2 24.772,30.88 25.87,29.781 38.452,29.781 39.741,31.071 Q6.1
NetD10_1: D10.1 D89.1 | length 6
  Top Layer w0.33: D10.1 71.878,57.752 D89.1
NetD11_1: D11.1 D12.1 | length 11.4
  Top Layer w0.33: D12.1 74.117,36.394 ; D11.1 D11.1@74.117,32.868 ; D11.1@74.117,32.868 74.117,36.394 ; D11.1@74.117,32.868 74.117,36.394
NetD13_2: D13.2 Q13.1 R26.2 | length 24.3
  Top Layer w0.33: R26.2 6.828,72.616 D13.2 v1@11.557,70.46 ; v1@14.732,65.379 14.986,65.125 14.986,59.436 Q13.1
  Bottom Layer w0.33: v1(11.481,70.46) 13.132,68.809 13.132,66.878 13.31,66.878 v1(14.58,65.608)
NetD14_2: D14.2 Q14.1 R27.2 | length 21.7
  Top Layer w0.33: R27.2 25.095,14.906 25.095,13.945 D14.2@26.517,12.522 ; D14.2 D14.2@26.517,12.522 ; Q14.1 37.903,11.919 34.823,8.839 28.702,8.839 26.517,11.024 D14.2@26.517,12.522
NetD17_1: D17.1 D19.1 | length 81.3
  Top Layer w0.33: D17.1 13.843,44.983 15.24,43.586 15.24,36.068 17.45,33.858 v1(17.45,25.324)
  Bottom Layer w0.33: v1(17.45,25.324) 20.447,25.324 37.896,7.874 D19.1
NetD18_1: D18.1 D20.1 | length 5.3
  Top Layer w0.33: D18.1@77.063,16.129 79.299,18.364 D20.1
NetQ1_3: Q1.3 R2.1 U1.2 | length 18.9
  Top Layer w0.33: R2.1 31.343,70.078 ; Q1.3 29.845,68.58 31.343,70.078 ; U1.2 40.208,72.314 39.395,71.501 36.652,71.501 35.229,70.078 31.343,70.078
NetQ2_1: Q2.1 R5.2 | length 11.5
  Top Layer w0.33: R5.2 50.901,72.187 51.689,72.974 54.965,72.974 57.45,70.489 Q2.1
NetQ3_1: Q3.1 R7.1 | length 18
  Top Layer w0.33: R7.1@32.77,73.812 R7.1@32.77,74.117 ; R7.1 R7.1@32.77,74.117 ; v1(33.401,74.117) R7.1@32.77,74.117 ; v1(39.497,64.719) 40.667,64.719 41.943,65.996 Q3.1
  Bottom Layer w0.33: v1(33.401,74.117) 35.089,74.117 39.497,69.71 v1(39.497,64.719)
NetQ3_3: Q3.3 R4.2 R5.1 | length 13.5
  Top Layer w0.33: Q3.3 44.018,70.18 46.025,72.187 R5.1 46.828,72.863 48.44,74.475 R4.2
NetQ4_1: Q4.1 R6.1 | length 33.4
  Top Layer w0.33: R6.1 28.854,78.66 v1(28.854,80.95) v1@28.854,81.411 ; v1@53.881,80.035 v1(54.331,80.035) 55.524,80.035 56.177,79.383 Q4.1
  Bottom Layer w0.33: v1(28.854,80.95) 33.02,80.95 34.036,79.934 53.111,79.934 53.01,80.035 v1(54.331,80.035)
NetQ5_3: Q5.3 R9.1 U2.2 | length 14.1
  Top Layer w0.33: Q5.3 26.782,52.055 27.838,53.111 R9.1 32.284,56.311 33.807,54.787 U2.2
NetQ6_3: Q6.3 R11.1 U3.2 | length 19.4
  Top Layer w0.33: R11.1 29.54,39.344 30.582,40.386 33.02,40.386 33.528,39.878 U3.2 33.528,36.805 36.144,34.188 38.983,34.188 40.101,33.071 Q6.3
NetQ7_1: Q7.1 R15.2 | length 13.7
  Top Layer w0.33: R15.2 51.835,58.226 v1(52.959,57.102) ; v1(57.734,54.483) 58.67,53.547 Q7.1
  Bottom Layer w0.33: v1(52.959,57.102) 55.578,54.483 v1(57.734,54.483)
NetQ8_1: Q8.1 R19.2 | length 10
  Top Layer w0.33: R19.2 55.854,36.474 57.374,34.954 Q8.1
NetQ9_1: Q9.1 R17.1 | length 6.9
  Top Layer w0.33: Q9.1 18.887,54.342 R17.1
NetQ9_3: Q9.3 R14.2 R15.1 | length 47.3
  Top Layer w0.33: R15.1 49.403,52.35 R14.2 R14.2 v1(51.003,51.562) ; v1(19.837,46.863) Q9.3 v1(19.837,46.863)
  Bottom Layer w0.33: v1(19.837,46.863) 46.304,46.863 v1(51.003,51.562)
NetQ10_1: Q10.1 R16.1 | length 40.6
  Top Layer w0.33: R16.1 24.435,53.416 25.273,53.416 25.781,53.924 25.781,56.769 26.899,57.887 v1(30.15,57.887) ; v1(55.876,60.96) 56.439,61.523 Q10.1
  Bottom Layer w0.33: v1(30.15,57.887) 30.15,60.376 30.734,60.96 v1(55.876,60.96)
NetQ11_1: Q11.1 R21.1 | length 13.8
  Top Layer w0.33: v1@32.207,31.166 33.213,32.172 Q11.1 ; v1(41.326,35.56) 41.326,35.632 41.635,35.941 41.686,35.89 R21.1
  Bottom Layer w0.33: v1(32.004,31.166) 34.874,34.036 40.462,34.036 41.326,34.9 v1(41.326,35.56)
NetQ11_3: Q11.3 R18.2 R19.1 | length 24.8
  Top Layer w0.33: Q11.3 34.535,34.071 35.23,33.376 38.684,33.376 39.954,32.106 41.935,32.106 44.78,34.95 50.356,34.95 ; R19.1 49.936,35.37 50.356,34.95 ; R18.2 53.746,33.985 53.594,34.137 51.169,34.137 50.356,34.95
NetQ12_1: Q12.1 R20.1 | length 39.3
  Top Layer w0.33: R20.1 22.682,42.909 v1(24.519,41.072) ; v1(48.92,44.425) 51.74,44.425 53.209,42.955 Q12.1
  Bottom Layer w0.33: v1(24.519,41.072) 45.567,41.072 v1(48.92,44.425)
NetQ13_3: Q13.3 R24.1 U4.2 | length 34.3
  Top Layer w0.33: U4.2 8.839,48.59 9.703,47.727 15.011,47.727 15.9,48.616 ; Q13.3 15.639,56.979 16.764,55.854 16.764,49.479 15.951,48.666 15.951,38.252 17.07,37.133 R24.1
NetQ14_3: Q14.3 R25.1 U5.2 | length 12.3
  Top Layer w0.33: R25.1 33.453,12.431 35.306,14.284 35.306,15.57 ; U5.2 35.306,15.57 ; Q14.3 36.957,13.919 35.306,15.57
NetQ15_1: Q15.1 R30.2 | length 34.9
  Top Layer w0.33: Q15.1 2.87,22.686 1.549,24.007 1.549,51.318 3.505,53.273 R30.2
NetQ16_1: Q16.1 R31.2 | length 9.2
  Top Layer w0.33: R31.2 55.998,16.713 56.095,16.616 Q16.1
NetQ17_1: Q17.1 R34.1 | length 14.8
  Top Layer w0.33: R34.1 13.208,54.03 13.208,57.607 13.563,57.963 16.586,57.963 18.196,59.572 Q17.1
NetQ17_3: Q17.3 R28.2 R30.1 | length 27.8
  Top Layer w0.33: R28.2 4.953,47.345 4.674,47.625 R30.1 5.172,51.273 7.925,54.026 v1(7.925,54.305) ; Q17.3 16.332,64.354 v1(16.332,61.697)
  Bottom Layer w0.33: v1(7.925,54.305) 7.925,56.261 12.421,60.757 15.392,60.757 v1(16.332,61.697)
NetQ18_1: Q18.1 R35.1 | length 15
  Top Layer w0.33: Q18.1 43.17,10.932 44.247,9.855 46.558,9.855 47.777,11.074 47.777,12.903 43.942,16.739 R35.1
NetQ18_3: Q18.3 R29.2 R31.1 | length 17.1
  Top Layer w0.33: Q18.3 43.51,13.716 42.621,14.605 42.621,19.101 43.104,19.583 44.857,19.583 45.87,18.569 ; R29.2 45.87,18.569 ; R31.1 47.267,16.713 45.87,18.11 45.87,18.569
NetQ19_1: Q19.1 R32.1 | length 36
  Top Layer w0.33: v1(4.724,33.071) 4.724,32.161 4.572,32.008 Q19.1
  Bottom Layer w0.33: v1(4.724,33.071) 4.724,55.143 4.572,55.296 11.608,62.332 v1(13.487,62.332)
NetQ20_1: Q20.1 R33.1 | length 82.5
  Top Layer w0.33: R33.1 22.864,22.936 23.876,22.936 24.562,22.25 24.562,19.253 28.702,15.113 28.702,11.1 29.718,10.084 34.188,10.084 37.109,13.005 38.938,13.005 39.345,12.598 39.345,10.236 40.869,8.712 47.32,8.712 48.92,10.312 48.92,13.259 49.835,14.173 57.2,14.173 57.912,13.462 57.912,10.871 58.572,10.211 62.611,10.211 63.348,10.947 63.348,17.501 62.535,18.313 58.903,18.313 58.293,18.923 58.293,23.804 57.505,24.591 Q20.1
NetR7_2: R7.2 U1.3 | length 14.1
  Top Layer w0.33: R7.2 30.12,75.091 30.848,75.819 40.284,75.819 41.478,74.625 U1.3
NetR17_2: R17.2 U2.3 | length 21.1
  Top Layer w0.33: v1(19.431,57.048) 19.431,57.205 19.075,57.561 R17.2 ; v1(35.026,52.222) 35.077,52.273 U2.3
  Bottom Layer w0.33: v1(19.431,57.048) 19.431,55.88 23.088,52.222 v1(35.026,52.222)
NetR21_2: R21.2 U3.3 | length 5.8
  Top Layer w0.33: U3.3 34.798,37.795 36.525,36.068 R21.2
NetR34_2: R34.2 U4.3 | length 7.6
  Top Layer w0.33: U4.3 10.109,49.301 10.389,49.022 13.614,49.022 14.249,49.657 R34.2
NetR35_2: R35.2 U5.3 | length 6.1
  Top Layer w0.33: U5.3 36.576,18.059 37.211,17.424 40.606,17.424 R35.2
"Signal + 1": C1.1 PC-1.H1_1 R6.2 | length 19.2
  Top Layer w0.33: v1(20.955,79.781) 20.955,78.069 C1.1 25.512,77.967 R6.2
  Bottom Layer w0.33: PC-1.H1_1 15.157,84.684 19.761,84.684 20.218,84.226 20.218,82.347 20.955,81.61 v1(20.955,79.781)
"Signal + 2": C4.1 PC-1.H1_3 R16.2 | length 72
  Top Layer w0.33: PC-1.H1_3 17.672,84.658 24.613,84.658 25.273,83.998 25.273,82.118 24.181,81.026 20.396,81.026 19.558,80.188 19.558,68.377 20.422,67.513 20.422,63.707 v1(21.488,62.641) 21.488,54.501 R16.2 ; C4.1 v1(45.415,62.641)
  Bottom Layer w0.33: v1(21.488,62.641) v1(45.415,62.641)
"Signal + 3": C7.1 PC-1.H1_5 R20.2 | length 48
  Top Layer w0.33: C7.1 21.336,38.633 21.539,38.836 R20.2 21.717,40.259 21.565,40.411 v1(21.565,40.691)
  Bottom Layer w0.33: PC-1.H1_5@18.542,82.702 17.399,81.559 17.399,47.95 18.566,46.783 18.566,44.73 21.565,41.732 v1(21.565,40.691)
"Signal + 4": C10.1 PC-1.H1_7 R32.2 | length 32.2
  Top Layer w0.33: R32.2 11.07,65.1 13.153,67.183 15.976,67.183 16.637,67.843 16.637,72.364 14.3,74.701 12.141,74.701 ; C10.1 12.141,74.701 ; PC-1.H1_7 21.115,83.022 20.462,83.022 12.141,74.701
"Signal + 5": C11.1 PC-1.H1_9 R33.2 | length 75.8
  Top Layer w0.33: C11.1 19.38,18.803 20.214,19.638 R33.2 20.214,27.232 18.847,28.599 18.847,34.823 19.533,35.509 19.533,38.329 19.101,38.76 17.196,38.76 16.84,39.116 16.84,48.133 17.577,48.87 17.577,57.683 19.406,59.512 19.406,64.084 19.025,64.465 17.323,64.465 17.12,64.668 17.12,66.713 17.45,67.043 17.45,79.045 20.218,81.813 22.447,81.813 PC-1.H1_9
V1: 2.1 Q2.3 Q7.3 Q8.3 Q15.3 Q16.3 R4.1 R14.1 R18.1 R28.1 R29.1 | length 204.5
  Top Layer w0.33: v1(2.972,36.424) 2.972,39.801 3.861,40.69 R28.1 ; v1(4.648,20.142) 4.648,18.143 Q15.3 4.611,14.515 2.1 ; v1(45.948,26.619) 45.948,23.877 R29.1 48.92,19.406 50.343,17.983 50.343,15.545 50.927,14.961 59.177,14.961 60.516,13.621 Q16.3 ; R14.1 v1@50.647,48.513 ; v1(50.038,28.778) 53.812,28.778 56.796,31.762 R18.1 59.29,30.374 Q8.3 ; R4.1 52.579,70.841 52.579,69.8 50.775,67.996 50.775,64.313 54.839,64.313 56.435,65.909 Q2.3 60.299,65.909 61.011,65.198 61.011,56.718 63.398,54.33 63.398,48.967 Q7.3 59.499,48.967 v1(59.045,48.513)
  Bottom Layer w0.33: v1(2.972,36.424) 2.692,36.144 2.692,27.838 5.016,25.514 5.016,24.371 ; v1(4.648,20.142) 4.648,24.003 5.016,24.371 ; v1(50.038,28.778) 48.362,28.778 46.202,26.619 v1(45.948,26.619) 45.948,29.184 9.83,29.184 5.016,24.371 ; v1(50.978,48.489) 59.021,48.489 v1(59.045,48.513) 59.045,34.63 v1(62.535,31.14)
V2: D2.1 D7.1 D9.1 D15.2 D16.1 PC-1.H2_27 | length 144.1
  Top Layer w0.33: D15.2 13.69,38.887 v1(13.69,37.135) ; v1(43.434,31.674) D9.1 v1(45.752,33.604) ; PC-1.H2_27 48.158,87.179 48.158,85.065 48.539,84.684 50.114,84.684 50.673,84.125 50.673,80.239 v1(54.635,76.276) ; v1(47.295,69.215) 47.295,68.129 D2.1 48.819,66.599 48.819,64.237 55.804,57.251 D7.1 ; v1(52.146,45.898) 52.146,47.6 55.188,50.641 D7.1 ; 56.661,50.641 D7.1
  Bottom Layer w0.33: v1(13.69,37.135) 42.647,37.135 43.434,36.348 v1(43.434,31.674) 44.729,30.378 51.029,30.378 51.816,29.591 51.816,15.494 v1(55.728,11.582) ; v1(45.752,33.604) 47.142,33.604 54.534,40.996 54.534,43.358 54.356,43.536 54.432,43.612 v1(52.146,45.898) ; v1(47.295,69.215) 53.315,75.235 53.594,75.235 v1(54.635,76.276)
Vcc: PC-1.H2_46 R1.1 R2.2 R8.1 R9.2 R10.1 R11.2 R22.1 R23.1 R24.2 R25.2 U1.4 U1.8 U2.4 U2.8 U3.4 U3.8 U4.4 U4.8 U5.4 U5.8 | length 268.5
  Top Layer w0.33: R22.1 2.727,75.651 1.499,74.422 1.499,63.01 U4.8 7.569,56.21 11.379,52.4 U4.4 ; R24.2 19.38,40.183 20.041,40.843 ; R8.1 24.908,56.912 24.943,56.947 ; R2.2 v1@28.219,73.128 ; R25.2 30.403,13.436 31.902,14.935 ; U3.8 32.258,42.394 ; U5.8 34.036,25.73 32.766,27 22.748,27 ; U2.4 36.347,54.381 37.185,54.381 37.922,55.118 37.922,62.484 35.966,64.44 35.662,64.44 v2(35.001,65.1) 32.537,62.636 U2.8 32.444,59.361 R9.2 25.798,59.361 24.943,58.506 24.943,56.947 ; v1(37.744,77.419) 37.744,77.631 U1.8 ; U5.4 37.846,20.65 37.16,21.336 32.868,21.336 31.902,20.371 31.902,14.935 ; R1.1 39.53,69.402 v1(40.843,70.715) 42.748,72.62 U1.4 ; R10.1 46.117,37.897 36.796,37.897 U3.4 36.068,39.7 33.374,42.394 32.258,42.394 ; 22.748,27 19.583,30.165 19.583,34.62 20.091,35.128 20.091,43.815 20.599,44.323 22.657,44.323 23.114,44.78 ; 22.748,27 25.324,24.425 25.324,20.218 28.035,17.507 R23.1 29.33,17.507 31.902,14.935 ; 23.114,44.78 23.114,43.637 24.357,42.394 R11.2 32.258,42.394 ; 23.114,44.78 23.114,53.853 24.943,55.682 24.943,56.947
  Bottom Layer w0.33: v2(11.76,50.851) 16.078,46.533 16.078,43.383 v2@18.351,41.11 ; v2(35.001,65.1) 28.448,71.653 v1(28.448,73.152) 30.81,75.514 35.839,75.514 v1(37.744,77.419) 38.506,76.657 ; v1(40.843,70.715) 40.843,74.321 38.506,76.657 ; PC-1.H2_46 68.504,89.77 68.504,82.398 67.716,81.61 58.674,81.61 55.575,78.511 54,78.511 53.162,77.673 52.476,77.673 51.46,76.657 38.506,76.657
  other v2: 18.44,40.945
pads on no net: 2.2 P1.MP1 P1.MP2 P2.MP1 P2.MP2 P3.MP1 P3.MP2 P4.MP1 P4.MP2 P5.MP1 P5.MP2 PC-1.H1_2 PC-1.H1_4 PC-1.H1_6 PC-1.H1_8 PC-1.H1_10 PC-1.H1_11 PC-1.H1_12 PC-1.H1_13 PC-1.H1_14 PC-1.H1_15 PC-1.H1_16 PC-1.H1_17 PC-1.H1_18 PC-1.H1_19 PC-1.H1_20 PC-1.H1_21 PC-1.H1_22 PC-1.H1_23 PC-1.H1_24 PC-1.H1_25 PC-1.H1_26 PC-1.H1_27 PC-1.H1_28 PC-1.H1_29 PC-1.H1_30 PC-1.H1_31 PC-1.H1_32 PC-1.H1_33 PC-1.H1_34 PC-1.H1_35 PC-1.H1_36 PC-1.H1_37 PC-1.H1_38 PC-1.H1_39 PC-1.H1_40 PC-1.H1_41 PC-1.H1_42 PC-1.H1_43 PC-1.H1_44 PC-1.H1_45 PC-1.H1_46 PC-1.H1_47 PC-1.H1_48 PC-1.H1_49 PC-1.H1_50 PC-1.H1_51 PC-1.H1_52 PC-1.H2_1 PC-1.H2_2 PC-1.H2_3 PC-1.H2_4 PC-1.H2_5 PC-1.H2_6 PC-1.H2_7 PC-1.H2_8 PC-1.H2_9 PC-1.H2_10 PC-1.H2_11 PC-1.H2_12 PC-1.H2_13 PC-1.H2_14 PC-1.H2_15 PC-1.H2_16 PC-1.H2_17 PC-1.H2_18 PC-1.H2_19 PC-1.H2_20 PC-1.H2_21 PC-1.H2_22 PC-1.H2_23 PC-1.H2_24 PC-1.H2_25 PC-1.H2_26 PC-1.H2_28 PC-1.H2_30 PC-1.H2_31 PC-1.H2_32 PC-1.H2_33 PC-1.H2_34 PC-1.H2_35 PC-1.H2_36 PC-1.H2_37 PC-1.H2_38 PC-1.H2_39 PC-1.H2_40 PC-1.H2_41 PC-1.H2_42 PC-1.H2_43 PC-1.H2_44 PC-1.H2_45 PC-1.H2_47 PC-1.H2_48 PC-1.H2_49 PC-1.H2_50 PC-1.H2_51 PC-1.H2_52
copper on no net:
  other v3: 4.96,5.117 84.98,5.142 8.76,90.817 82.46,90.817

## Silkscreen, mask and mechanical layers (free items; w line width, h text height)
Mechanical 2:
  lines w0.762: 0.305,4.216 0.305,89.967 ; 0.417,3.947 3.439,0.925 ; 0.305,89.967 cw(c0.686,89.967) 0.417,90.237 ; 0.305,89.967 cw(c0.686,89.967) 0.416,90.236 0.417,90.237 ; 0.417,90.237 4.505,94.325 ; 3.439,0.924 ccw(c3.708,1.194) 3.439,0.924 ; 3.439,0.925 ccw(c3.708,1.194) 3.439,0.924 ; 3.439,0.925 3.439,0.924 ; 3.439,0.924 3.439,0.924 ; 3.439,0.924 3.464,0.899 ; 3.464,0.899 ccw(c3.734,1.168) 3.734,0.787 ; 3.464,0.899 ccw(c3.734,1.168) 3.734,0.787 ; 3.464,0.899 3.464,0.899 ; 3.734,0.787 84.506,0.787 85.7,0.787 ; 4.506,94.326 cw(c4.775,94.056) 4.775,94.437 ; 4.505,94.325 cw(c4.775,94.056) 4.775,94.437 ; 4.505,94.325 4.506,94.326 ; 4.775,94.437 4.801,94.437 87.694,94.437 ; 85.7,0.787 ccw(c85.7,1.168) 85.969,0.899 85.969,0.899 ; 85.7,0.787 ccw(c85.7,1.168) 85.969,0.899 ; 85.969,0.899 90.058,4.988 ; 87.694,94.437 cw(c87.884,94.107) 88.154,94.376 ; 87.694,94.437 cw(c87.884,94.107) 88.153,94.376 88.154,94.376 ; 88.154,94.376 90.058,92.472 ; 90.058,4.988 ccw(c89.789,5.258) 90.17,5.258 ; 90.058,4.988 ccw(c89.789,5.258) 90.17,5.258 ; 90.058,4.988 90.058,4.988 ; 90.058,92.472 cw(c89.789,92.202) 90.17,92.202 ; 90.058,92.472 90.058,92.471 cw(c89.789,92.202) 90.17,92.202 ; 90.17,5.258 90.17,91.821 90.17,92.202
Drill Drawing:
  text ".Legend" at 69.621,2.692 h1.52

## Text inside footprints (layer, text, board x,y; h text height)
PC-1: Mechanical 1 "J1" at 53.262,87.276 h0.76; Top Layer "52" at 79.455,90.082 h1.52; Top Layer "51" at 79.455,87.582 h1.52; Top Layer "52" at 79.555,85.082 h1.52; Top Layer "51" at 79.555,82.582 h1.52; Top Layer "2" at 10.941,90.881 h1.52; Top Layer "1" at 11.315,88.462 h1.52; Top Layer "2" at 10.814,86.081 h1.52; Top Layer "1" at 11.315,83.382 h1.52; Top Layer "H2" at 6.902,87.224 h1.52; Top Layer "H1" at 6.855,84.382 h1.52